# Altium PCB Copy of PCB_PnP.PcbDoc
Units mil, origin at the board's own origin, x right, y up, seen from the top; angles counter-clockwise.
Board outline 3460 x 3400 mil, 4 copper layers (Top Layer, Layer 1, Layer 2, Bottom Layer), stack 23.756 mil thick; 13 components, 27 nets, 118 pads, 0 vias.
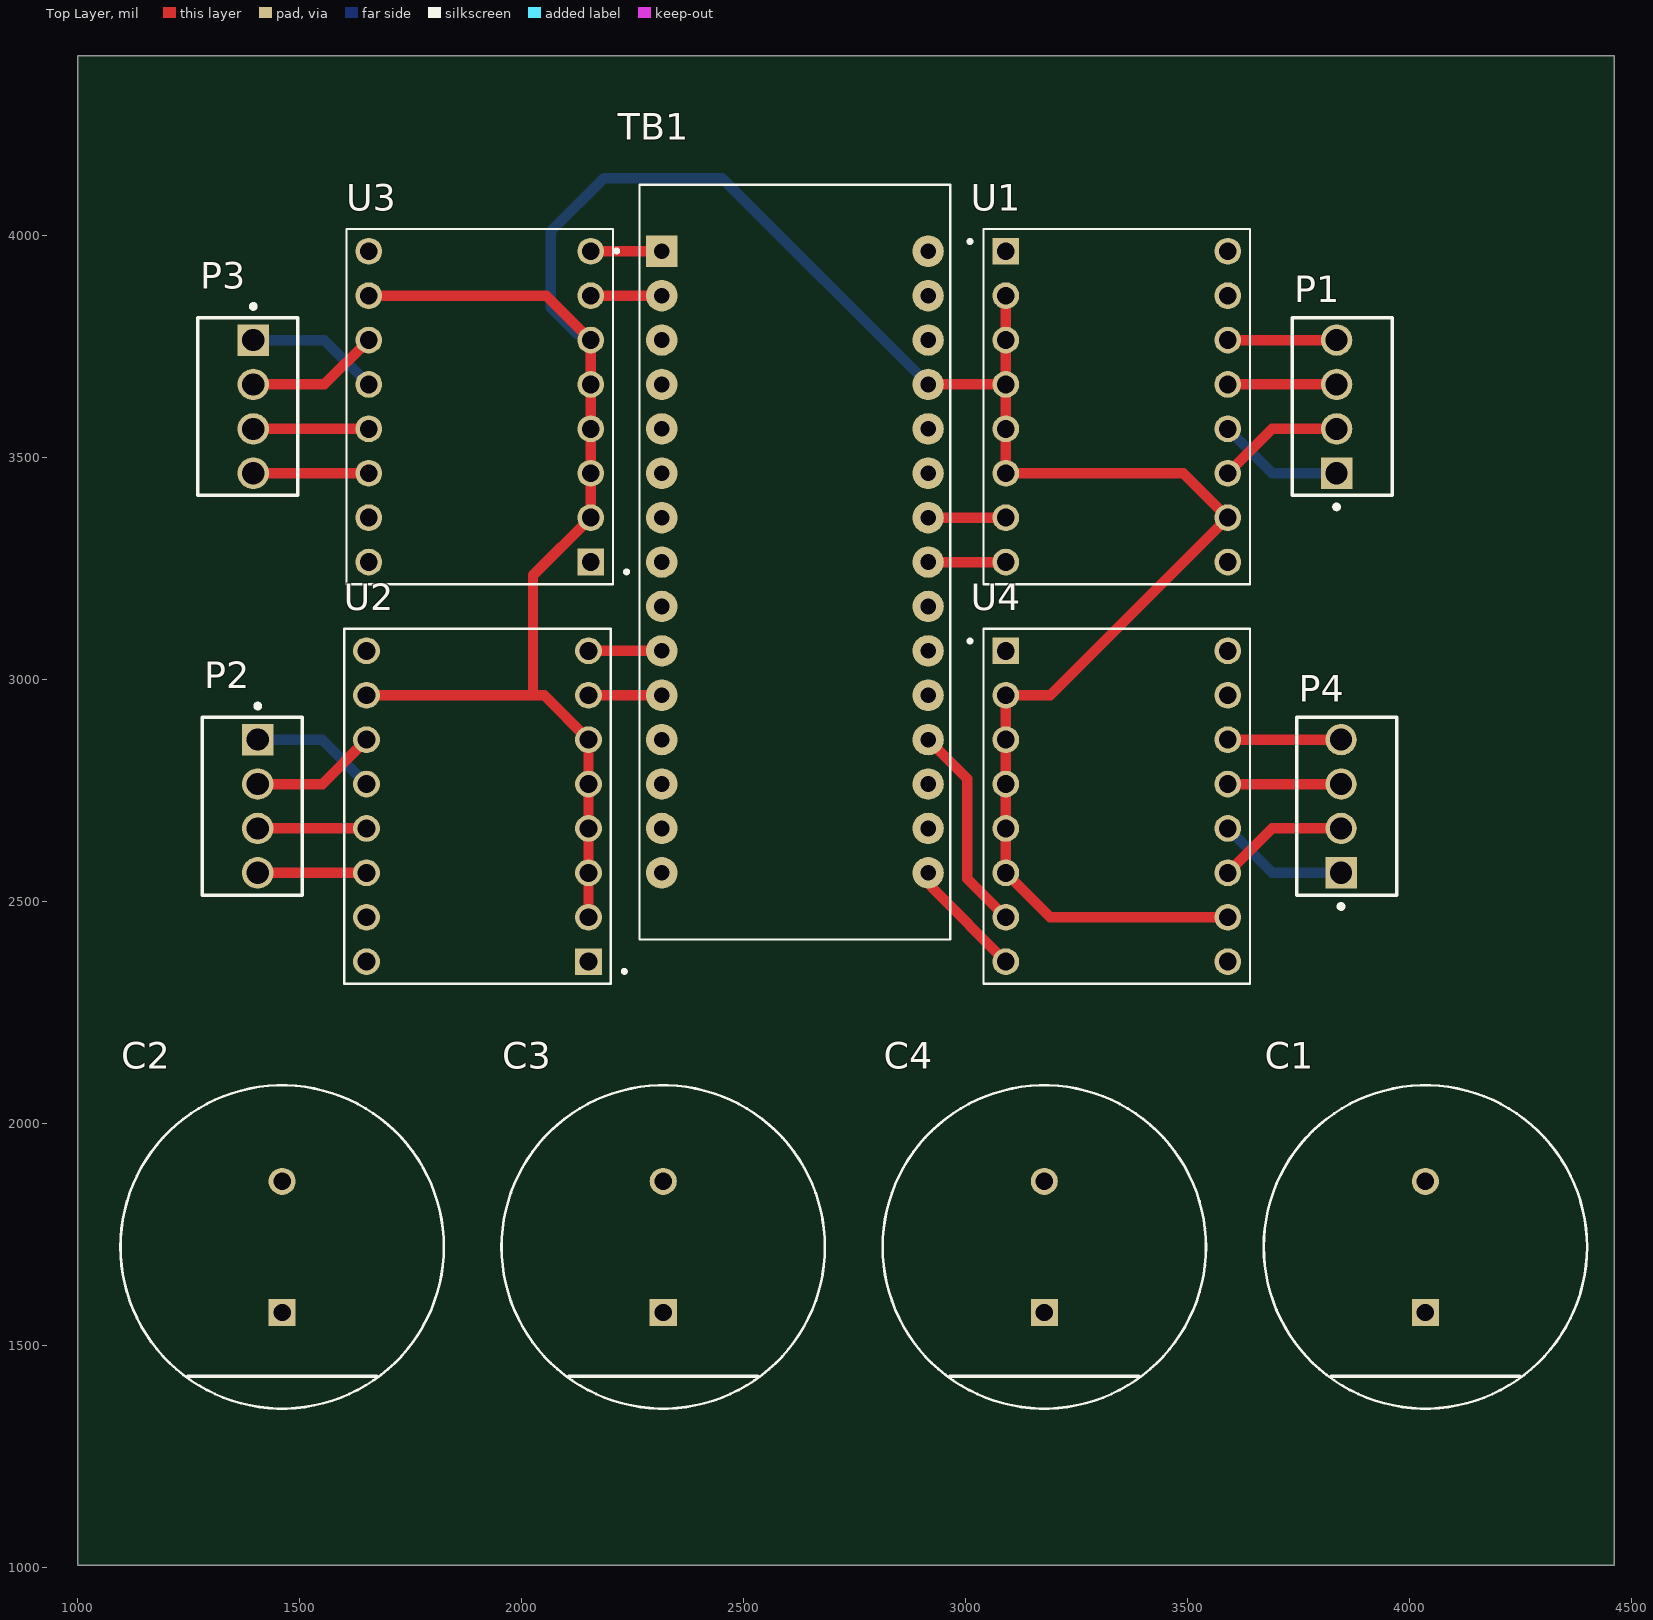
[diagram p0: Top Layer view]
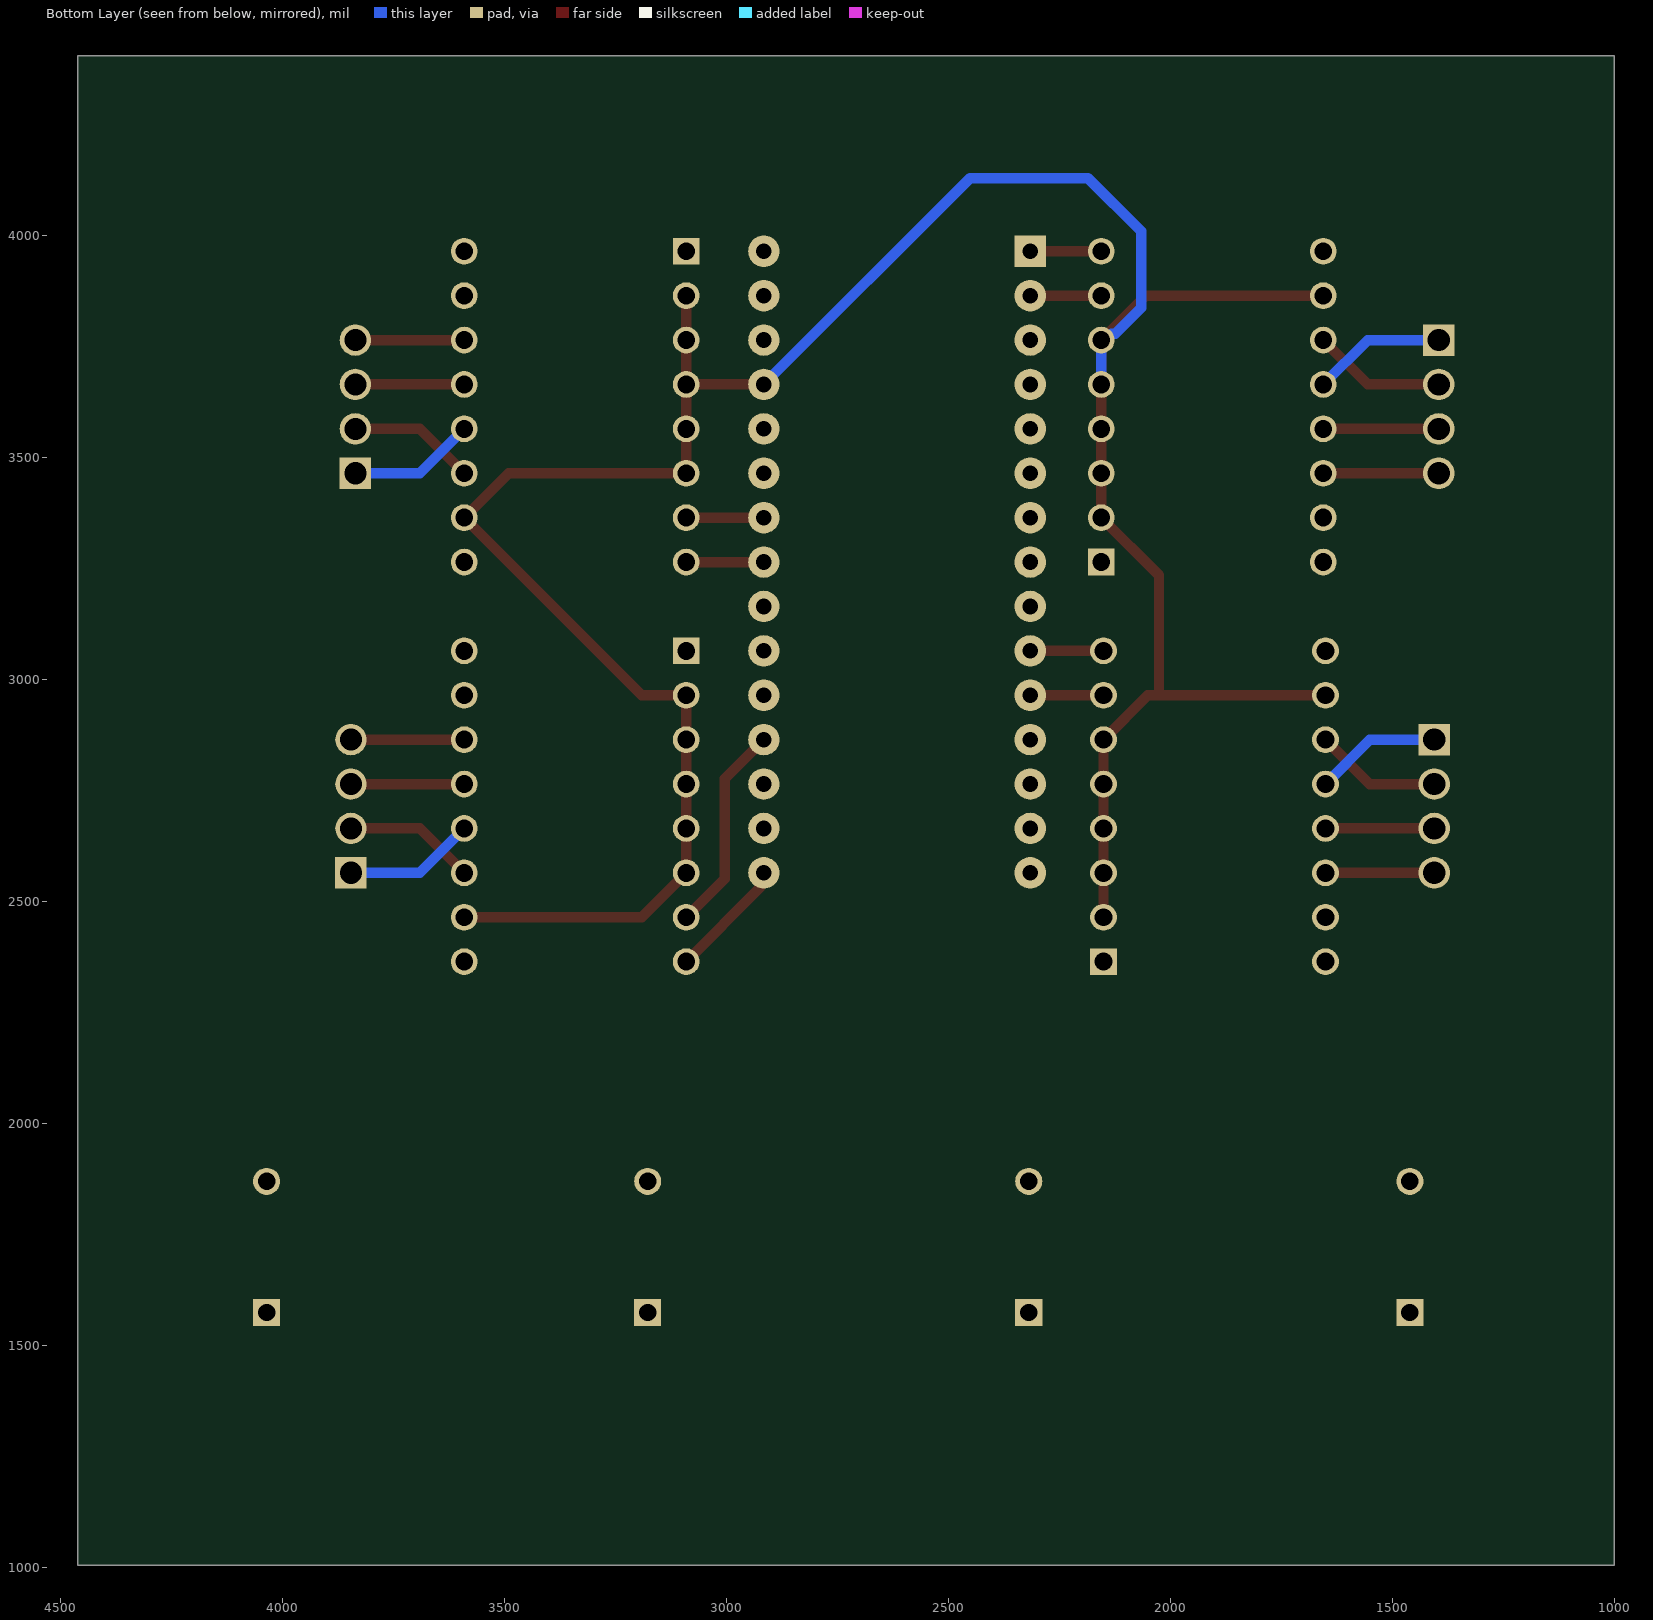
[diagram p1: Bottom Layer view, seen from below]
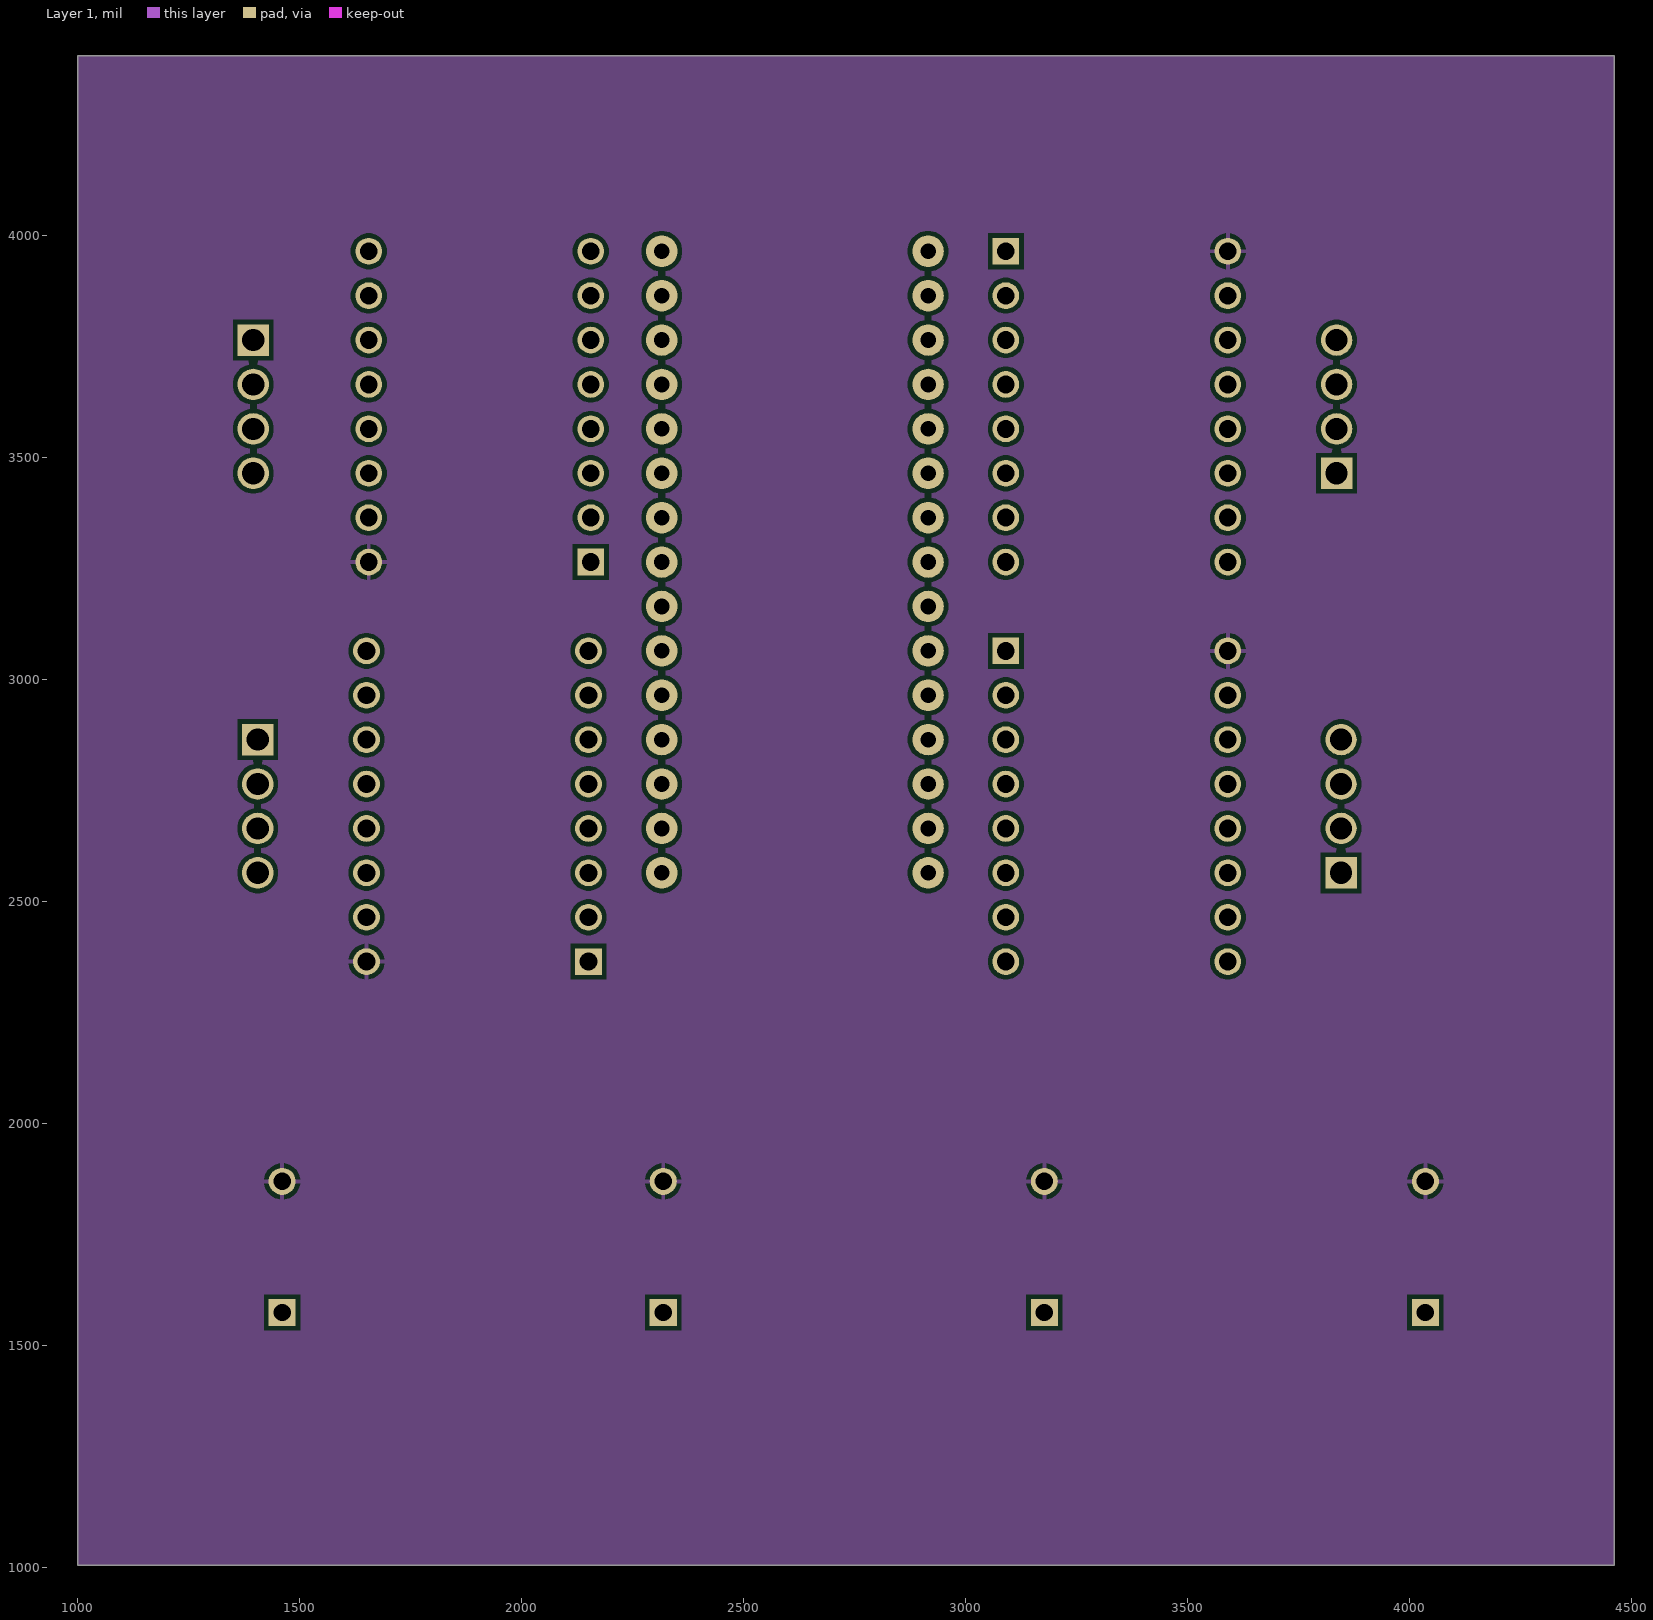
[diagram p2: Layer 1]
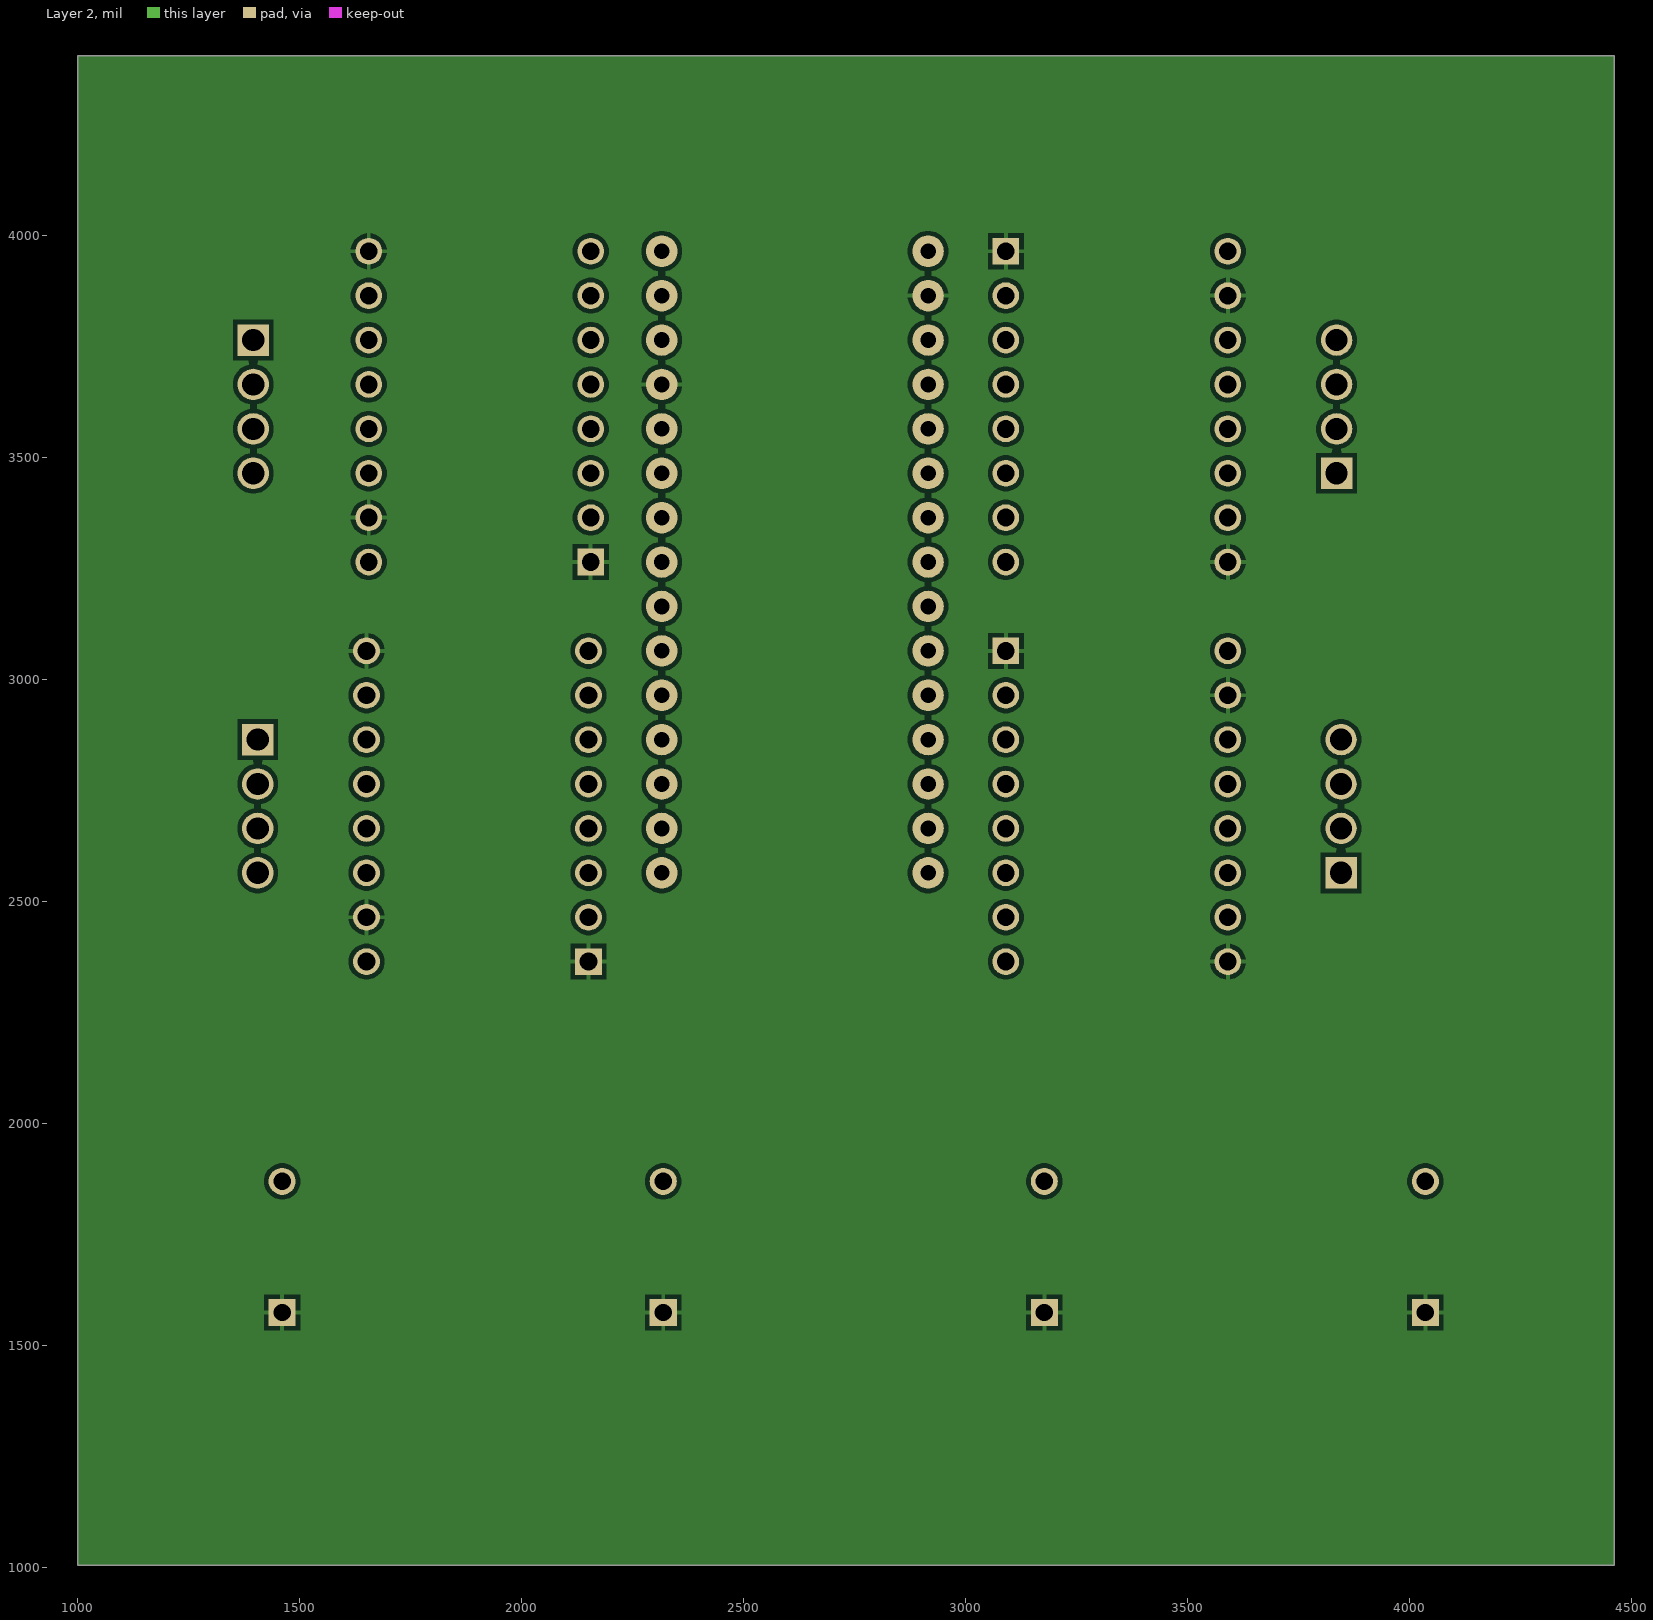
[diagram p3: Layer 2]

## Layer stack, top to bottom
Top Solder: solder mask 0.4, Solder Resist, Dk 3.5
Top Layer: signal copper 1.4
Dielectric 2: prepreg 2.8, PP-006, Dk 4.1
Layer 1: signal copper 1.378
Dielectric 1: dielectric 12.6, FR-4, Dk 4.8
Layer 2: signal copper 1.378
Dielectric 3: prepreg 2.8, PP-006, Dk 4.1
Bottom Layer: signal copper 1.4
Bottom Solder: solder mask 0.4, Solder Resist, Dk 3.5

## Board outline
1000,1005 4460,1005 4460,4405 1000,4405

## Design rules (kind name [scope] priority, off if disabled: settings)
Clearance [All] p1: gap=10 ignorepadtopadclearanceinfootprint=FALSE
PolygonConnect [All] p1: connectstyle=Relief reliefconductorwidth=10 reliefentries=4 polygonreliefangle="90 Angle" airgapwidth=10
RoutingVias [All] p1: holewidth=28 width=50 viastyle="Through Hole" minholewidth=28 minwidth=50 maxholewidth=28 maxwidth=50
SolderMaskExpansion [All] p1: expansion=4 istentingtop=FALSE
SupplyNets "Schematic Supply Nets_2" [InNet('+12')] p1: voltage=0.000
SupplyNets "Schematic Supply Nets_1" [InNet('+5')] p2: voltage=0.000
SupplyNets "Schematic Supply Nets" [InNet('GND')] p3: voltage=0.000
Width [All] p1: maxlimit=23.62 minlimit=10 preferedwidth=23.62 minimp=50.000000 maximp=50.000000 favimp=50.000000
30 further rules are at their usual default settings.

## Components (designator, comment, footprint, x,y, rotation, side; value= is the part's Value field where it differs from the comment)
C1 "100uF" FP-RAD-TH-D_18_0_5-L_40_2-MFG 4035,1722.36 r90 top
C2 "100uF" FP-RAD-TH-D_18_0_5-L_40_2-MFG 1460,1722.36 r90 top
C3 "100uF" FP-RAD-TH-D_18_0_5-L_40_2-MFG 2318.33,1722.36 r90 top
C4 "100uF" FP-RAD-TH-D_18_0_5-L_40_2-MFG 3176.67,1722.36 r90 top
P1 "640456-4" TECO-640456-4 3835,3615 r270 top
P2 "640456-4" TECO-640456-4 1405,2715 r90 top
P3 "640456-4" TECO-640456-4 1395,3615 r90 top
P4 "640456-4" TECO-640456-4 3845,2715 r270 top
TB1 "ARDUINO_NANO" SHIELD_ARDUINO_NANO 2615,3265 r0 top
U1 "A4988_STEPPER_MOTOR_DRIVER_CARRIER_BLACK" MODULE_A4988_STEPPER_MOTOR_DRIVER_CARRIER_BLACK 3340,3615 r0 top
U2 "4988_STEPPER_MOTOR_DRIVER_CARRIER_BLACK" MODULE_A4988_STEPPER_MOTOR_DRIVER_CARRIER_BLACK 1900,2715 r180 top
U3 "A4988_STEPPER_MOTOR_DRIVER_CARRIER_BLACK" MODULE_A4988_STEPPER_MOTOR_DRIVER_CARRIER_BLACK 1905,3615 r180 top
U4 "A4988_STEPPER_MOTOR_DRIVER_CARRIER_BLACK" MODULE_A4988_STEPPER_MOTOR_DRIVER_CARRIER_BLACK 3340,2715 r0 top

## Footprints (in the part's own frame and the unit in brackets; to place one, negate y for a bottom-side part, rotate by r counter-clockwise, add the part's x,y. Pads: shape width x height; smd on the part's side, far side on the other; paste and mask are expansions set on the pad)
FP-RAD-TH-D_18_0_5-L_40_2-MFG [mm]
  rect 1.55x1.55 hole 1 paste-2539.97 mask+0: 1(-3.75,0)
  round 1.55 hole 1 paste-2539.97 mask+0: 2(3.75,0)
  silkscreen extent -9.25,-9.25 9.25,9.25, body extent -9.35,-9.35 9.35,9.35, height 0.25
MODULE_A4988_STEPPER_MOTOR_DRIVER_CARRIER_BLACK [mm]
  rect 1.53x1.53 hole 1.02: 1(-6.35,8.89)
  round 1.53 hole 1.02: 2(-6.35,6.35) 3(-6.35,3.81) 4(-6.35,1.27) 5(-6.35,-1.27) 6(-6.35,-3.81) 7(-6.35,-6.35) 8(-6.35,-8.89) 9(6.35,-8.89) 10(6.35,-6.35) 11(6.35,-3.81) 12(6.35,-1.27) 13(6.35,1.27) 14(6.35,3.81) 15(6.35,6.35) 16(6.35,8.89)
  silkscreen extent -8.5,-10.16 7.62,10.16
SHIELD_ARDUINO_NANO [mm]
  rect 1.8x1.8 / inner round 1.8 / far side rect 1.8x1.8 hole 0.9: 1(-7.62,17.78)
  round 1.8 hole 0.9: 2(-7.62,15.24) 3(-7.62,12.7) 4(-7.62,10.16) 5(-7.62,7.62) 6(-7.62,5.08) 7(-7.62,2.54) 8(-7.62,0) 9(-7.62,-2.54) 10(-7.62,-5.08) 11(-7.62,-7.62) 12(-7.62,-10.16) 13(-7.62,-12.7) 14(-7.62,-15.24) 15(-7.62,-17.78) 16(7.62,-17.78) 17(7.62,-15.24) 18(7.62,-12.7) 19(7.62,-10.16) 20(7.62,-7.62) 21(7.62,-5.08) 22(7.62,-2.54) 23(7.62,0) 24(7.62,2.54) 25(7.62,5.08) 26(7.62,7.62) 27(7.62,10.16) 28(7.62,12.7) 29(7.62,15.24) 30(7.62,17.78)
  silkscreen extent -10.3,-21.59 8.89,21.59, body extent -9,-21.6 9,23.4, height 12.6
TECO-640456-4 [mm] "Through Hole, 4-Leads, Body 10.16x5.72mm, Pitch 2.54mm"
  rect 1.8x1.8 hole 1.27 paste-2539.97: 1(3.81,0)
  round 1.8 hole 1.27 paste-2539.97: 2(1.27,0) 3(-1.27,0) 4(-3.81,0)
  silkscreen extent -5.08,-2.54 5.86,3.18, body extent -5.08,-2.54 5.08,3.18, height 10.03

## Part data
C1 C2 C3: library part CMP-05427-001087-1, "Aluminum Electrolytic Capacitors (Radial Lead Type) 100uF ±20% 400V", Case/Package=Radial, Leakage Current=2.41mA, Max Operating Temperature=105°C, Min Operating Temperature=-25°C, Package Quantity=50, Ripple Current=2.06A, Tolerance=20%, Voltage=400V, Capacitance=100uF, Construction=RADIAL, Diameter=18mm, Dissipation Factor=0.24%, Height=40mm, Height - Seated (Max)=1.654inch, Lead Diameter=0.8mm, Lead Free="Lead Free", Lead Pitch=7.5mm, Length=40mm, Life (Hours)=10000Hour, Mount="Through Hole", Number of Pins=2, Packaging=Bulk, Polarity=Polar, Radiation Hardening=No, REACH SVHC="No SVHC", Ripple Current (AC)=2.06A, RoHS Compliant=Yes, Series=EE, Termination=Radial, Voltage Rating=400V, Voltage Rating (DC)=400V
C4: library part CMP-05427-001087-1, Case/Package=Radial, Leakage Current=2.41mA, Max Operating Temperature=105°C, Min Operating Temperature=-25°C, Package Quantity=50, Ripple Current=2.06A, Tolerance=20%, Voltage=400V, Capacitance=100uF, Construction=RADIAL, Diameter=18mm, Dissipation Factor=0.24%, Height=40mm, Height - Seated (Max)=1.654inch, Lead Diameter=0.8mm, Lead Free="Lead Free", Lead Pitch=7.5mm, Length=40mm, Life (Hours)=10000Hour, Mount="Through Hole", Number of Pins=2, Packaging=Bulk, Polarity=Polar, Radiation Hardening=No, REACH SVHC="No SVHC", Ripple Current (AC)=2.06A, RoHS Compliant=Yes, Series=EE, Termination=Radial, Voltage Rating=400V, Voltage Rating (DC)=400V
P1 P2 P3 P4: library part CMP-2000-05419-1, "Male Header, Pitch 2.54 mm, 1 x 4 Position, Height 10.03 mm, Tail Length 3.56 mm, RoHS, Bulk", Color=White, Current, Rating="5 /  / A", Flammability Rating=UL94V-0, Manufacturer="TE Connectivity", Temperature, Operating="-55to+105 /  / degC", Voltage, Rating="250 /  / V", Agency Approvals=CSA,UL, Angle=Straight, Brand/Series=MTA-100Series, Color, Housing=White, Connector Type=MTA-100, Contact Centerline Spacing="0.100 /  / in.", Contact Mating Area Plating=Tin, Contact Plating=Tin, Contact Shape=Square, Contact Termination Area Plating=Tin, Datasheet URL=https://datasheet.ciiva.com/16286/eng-ds-82056-mta-0608-16286228.pdf, Datasheet Version=Dec-14, Length, Overall="0.4 /  / \"", Length, Pin="0.14 /  / \"", Length, Terminal Post="0.14 /  / in.", Manufacturer URL=http://www.te.com/, Material, Contact=CopperAlloy, Material, Housing=Polyester, Mount Angle=Vertical, Mounting Hole Size="0.04 /  / \"", Mounting Type=PCMount, Number of Contacts=4, Number of Positions=4, Number of Rows=1, Pin Spacing="0.1 /  / \"", Primary Type=InterconnectSystem, Size, Post="0.025 /  / in.", Special Features=Pinstrip, Standards=RoHSCompliant,ELVCompliant,UL94V-0, Termination=Solder, Type=PCBPlug
TB1: "Small, complete, and breadboard-friendly board based on the ATmega328 (Arduino Nano 3.x)", Package="Non-Standard Arduino", Availability="Not in stock", Check_prices=https://www.snapeda.com/parts/Arduino%20Nano/Arduino/view-part/?ref=eda, MF=Arduino, MP="Arduino Nano", Price=None, SnapEDA_Link=https://www.snapeda.com/parts/Arduino%20Nano/Arduino/view-part/?ref=snap
U1 U3 U4: Package=None, Availability=Unavailable, MF=Pololu, MP="A4988 STEPPER MOTOR DRIVER CARRIER BLACK", Price=None, SnapEDA_Link=https://www.snapeda.com/parts/A4988%20STEPPER%20MOTOR%20DRIVER%20CARRIER%20BLACK/Pololu/view-part/1450050/?ref=snap
  U3: BuyPart=https://www.snapeda.com/parts/A4988%20STEPPER%20MOTOR%20DRIVER%20CARRIER%20BLACK/Pololu/view-part/1450050/?ref=eda
U2: library part A4988_STEPPER_MOTOR_DRIVER_CARRIER_BLACK, Package=None, Availability=Unavailable, MF=Pololu, MP="A4988 STEPPER MOTOR DRIVER CARRIER BLACK", Price=None, SnapEDA_Link=https://www.snapeda.com/parts/A4988%20STEPPER%20MOTOR%20DRIVER%20CARRIER%20BLACK/Pololu/view-part/1450050/?ref=snap

## Nets (pads, with @x,y where several pads share a name; then routed paths per layer and width w, separated by ;. In a path a pad name is that pad's centre, name@x,y a point inside that pad or via, vN(x,y) a via of type N, cw(c..) or ccw(c..) an arc to the next point about the centre after c; other vN are vias at no path point)
+5: TB1.27 U1.2 U1.3 U1.4 U1.5 U1.6 U1.10 U2.2 U2.3 U2.4 U2.5 U2.6 U2.10 U3.2 U3.3 U3.4 U3.5 U3.6 U3.10 U4.2 U4.3 U4.4 U4.5 U4.6 U4.10 | length 6545
  Top Layer w23.62: U2.10 2025,2965 ; U3.10 2055,3865 U3.6 U3.5 U3.4 U3.3 U3.2 2025,3235 2025,2965 ; U2.2 U2.3 U2.4 U2.5 U2.6 2050,2965 2025,2965 ; TB1.27 U1.4 ; U1.2 U1.3 U1.4 ; U4.10 3190,2465 U4.6 U4.5 U4.4 U4.3 U4.2 3190,2965 U1.10 3490,3465 U1.6 U1.5 U1.4
  Bottom Layer w23.62: U3.5 U3.6 2145.09,3765 2131.06,3779.04 2123.58,3779.04 2065,3837.61 2065,4010 2185,4130 2450,4130 TB1.27
+12: C1.2 C2.2 C3.2 C4.2 U1.16 U2.16 U3.16 U4.16
A1A: P4.1 U4.12 | length 296.4
  Bottom Layer w23.62: U4.12 3690,2565 P4.1
A1B: P4.2 U4.11 | length 296.4
  Top Layer w23.62: U4.11 3690,2665 P4.2
A2A: P4.3 U4.13 | length 255
  Top Layer w23.62: U4.13 P4.3
A2B: P4.4 U4.14 | length 255
  Top Layer w23.62: U4.14 P4.4
ADIR: TB1.16 U4.8 | length 272.5
  Top Layer w23.62: TB1.16 2924.04,2555.96 2924.04,2530.96 U4.8
ASTEP: TB1.19 U4.7 | length 472.5
  Top Layer w23.62: TB1.19 3003.52,2776.48 3003.52,2551.48 U4.7
GND: C1.1 C2.1 C3.1 C4.1 TB1.4 TB1.29 U1.1 U1.9 U1.15 U2.1 U2.9 U2.15 U3.1 U3.9 U3.15 U4.1 U4.9 U4.15
X1A: P1.1 U1.12 | length 286.4
  Bottom Layer w23.62: U1.12 3690,3465 P1.1
X1B: P1.2 U1.11 | length 286.4
  Top Layer w23.62: U1.11 3690,3565 P1.2
X2A: P1.3 U1.13 | length 245
  Top Layer w23.62: U1.13 P1.3
X2B: P1.4 U1.14 | length 245
  Top Layer w23.62: U1.14 P1.4
XDIR: TB1.23 U1.8 | length 175
  Top Layer w23.62: TB1.23 U1.8
XSTEP: TB1.24 U1.7 | length 175
  Top Layer w23.62: TB1.24 U1.7
Y1A: P2.1 U2.12 | length 286.4
  Bottom Layer w23.62: P2.1 1550,2865 U2.12
Y1B: P2.2 U2.11 | length 286.4
  Top Layer w23.62: P2.2 1550,2765 U2.11
Y2A: P2.3 U2.13 | length 245
  Top Layer w23.62: P2.3 U2.13
Y2B: P2.4 U2.14 | length 245
  Top Layer w23.62: P2.4 U2.14
YDIR: TB1.10 U2.8 | length 165
  Top Layer w23.62: U2.8 TB1.10
YSTEP: TB1.11 U2.7 | length 165
  Top Layer w23.62: U2.7 TB1.11
Z1A: P3.1 U3.12 | length 301.4
  Bottom Layer w23.62: P3.1 1555,3765 U3.12
Z1B: P3.2 U3.11 | length 301.4
  Top Layer w23.62: P3.2 1555,3665 U3.11
Z2A: P3.3 U3.13 | length 260
  Top Layer w23.62: P3.3 U3.13
Z2B: P3.4 U3.14 | length 260
  Top Layer w23.62: P3.4 U3.14
ZDIR: TB1.1 U3.8 | length 160
  Top Layer w23.62: U3.8 TB1.1
ZSTEP: TB1.2 U3.7 | length 160
  Top Layer w23.62: U3.7 TB1.2
pads on no net: TB1.3 TB1.5 TB1.6 TB1.7 TB1.8 TB1.9 TB1.12 TB1.13 TB1.14 TB1.15 TB1.17 TB1.18 TB1.20 TB1.21 TB1.22 TB1.25 TB1.26 TB1.28 TB1.30

## Polygon pours and split planes (outlines as drawn)
+12 on Layer 1 "+12_L02_P001" (solid, pour order 1): 1000,4405 4460,4405 4460,1005 1000,1005
GND on Layer 2 "GND_L03_P002" (solid, pour order 2): 1000,4405 4460,4405 4460,1005 1000,1005